# Altium PCB PCB1.PcbDoc
Units mm, origin at the board's own origin, x right, y up, seen from the top; angles counter-clockwise.
Board outline 10 x 9 mm, 2 copper layers (Top Layer, Bottom Layer); 8 components, 6 nets, 23 pads, 4 vias.
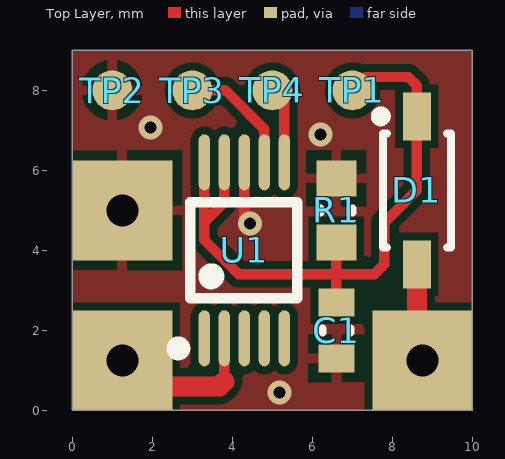
[diagram p0: Top Layer view]
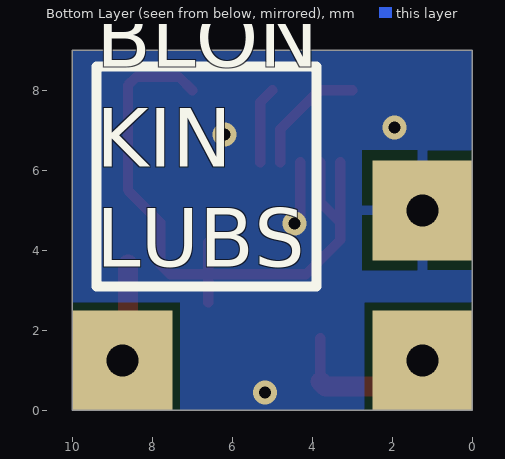
[diagram p1: Bottom Layer view, seen from below]

## Layer stack, top to bottom
Top Solder: solder mask 0.0102, Solder Resist, Dk 3.5
Top Layer: signal copper 0.0356
Dielectric 1: dielectric 0.32, FR-4, Dk 4.8
Bottom Layer: signal copper 0.0356
Bottom Solder: solder mask 0.0102, Solder Resist, Dk 3.5

## Board outline
0,0 10,0 10,9 0,9

## Design rules (kind name [scope] priority, off if disabled: settings)
Clearance [All] p1: gap=0.2 ignorepadtopadclearanceinfootprint=FALSE
PolygonConnect [All] p1: thpad.connectstyle=Relief thpad.reliefconductorwidth=0.254 thpad.reliefentries=4 thpad.polygonreliefangle="90 Angle" thpad.airgapwidth=0.254 smdpad.connectstyle=Relief smdpad.reliefconductorwidth=0.254 smdpad.reliefentries=4 smdpad.polygonreliefangle="90 Angle" smdpad.airgapwidth=0.254 via.connectstyle=Direct via.reliefconductorwidth=0.254 via.reliefentries=4 via.polygonreliefangle="90 Angle" via.airgapwidth=0.254
RoomDefinition Sheet1 [InComponentClass('Sheet1')] p1: confinementstyle=ConfineIn formatcopy=TRUE lockcomponents=FALSE outline -1.2,-1.2 11,-1.2 11,9.8 -1.2,9.8
RoutingVias [All] p1: holewidth=0.711 width=1.27 viastyle="Through Hole" minholewidth=0.711 minwidth=1.27 maxholewidth=0.711 maxwidth=1.27
SolderMaskExpansion SolderMaskExpansion_VIAS [IsVia] p1: expansion=-99
SolderMaskExpansion [All] p2: expansion=0.102
Width [All] p1: maxlimit=1 minlimit=0.254 preferedwidth=0.5
30 further rules are at their usual default settings.

## Components (designator, comment, footprint, x,y, rotation, side; value= is the part's Value field where it differs from the comment)
C1 "CAP 2.2uF 6.3V 0603(1608)" CAPC0603(1608)100_L 6.6,2 r90 top value=2.2uF
D1 "1N5819HW-7-F" DIOD-SOD-123-2_V 8.611,5.5 r90 top
R1 "10K 5% 0603(1608)" RESC0603(1608)_N 6.6,5 r270 top value="10000.00 Ohm"
TP1 "TEST_POINT" TP-SMD-1mm#1 7.3,11.5 r90 top
TP2 "TEST_POINT" TP-SMD-1mm#2 2.7,8.5 r90 top
TP3 "TEST_POINT" TP-SMD-1mm#3 4.5,8.5 r90 top
TP4 "TEST_POINT" TP-SMD-1mm#4 6,8.5 r90 top
U1 "CH554E" LC-MSOP-10 4.3,4 r0 top

## Footprints (in the part's own frame and the unit in brackets; to place one, negate y for a bottom-side part, rotate by r counter-clockwise, add the part's x,y. Pads: shape width x height; smd on the part's side, far side on the other; paste and mask are expansions set on the pad)
CAPC0603(1608)100_L [mm] "Chip Capacitor, Body 1.6x0.8mm, Height 1.0mm, IPC High Density"
  rect 0.7x0.9 smd: 1(-0.7,0) 2(0.7,0)
  silkscreen extent -0.05,-0.35 0.05,0.35, body extent -0.87,-0.47 0.88,0.48, height 1
DIOD-SOD-123-2_V [mm] "SOD-123, 2-Leads, Body 2.85x1.7mm (max), Pitch 3.7mm"
  rect 1.2x0.7 smd: 1(-1.85,0) 2(1.85,0)
  silkscreen extent -1.43,-0.85 1.97,1.02, body extent -1.42,-0.85 1.43,0.85, height 1.45
LC-MSOP-10 [mm] "Footprint from SZLCSC example"
  oval 0.28x1.4 smd mask+0.051: 1(-1,-2.2) 2(-0.5,-2.2) 3(0,-2.2) 4(0.5,-2.2) 5(1,-2.2) 6(1,2.2) 7(0.5,2.2) 8(0,2.2) 9(-0.5,2.2) 10(-1,2.2)
  silkscreen extent -1.8,-2.6 1.33,1.2
RESC0603(1608)_N [mm] "Chip Resistor, Body 1.6x0.8mm, IPC Medium Density"
  rect 0.9x1 smd: 1(-0.8,0) 2(0.8,0)
  silkscreen extent -0.05,-0.4 0.05,0.4, body extent -0.85,-0.47 0.85,0.47, height 0.6
TP-SMD-1mm#1 [mm] "Test point, round, 1mm, SMD"
  round 1 smd paste-999: 1(-3.5,0.3)
TP-SMD-1mm#2 [mm] "Test point, round, 1mm, SMD"
  round 1 smd paste-999: 1(-0.5,1.7)
TP-SMD-1mm#3 [mm] "Test point, round, 1mm, SMD"
  round 1 smd paste-999: 1(-0.5,1.5)
TP-SMD-1mm#4 [mm] "Test point, round, 1mm, SMD"
  round 1 smd paste-999: 1(-0.5,1)

## Part data
C1: library part CMP-1035-02754-1, "CAP 2.2uF 6.3V ±10% 0603 (1608 Metric) Thickness 1mm SMD", Case-EIA=0603, Case-Metric=1608, Rated Voltage="6.3 V", Tolerance=±10%, Max Thickness="1 mm", Technology=SMT
D1: library part CMP-0303-00003-1, "1.0 A Surface Mount Schottky Barrier Rectifier, 40 V, -65 to 125 degC, 2-Pin SOD-123 Package, RoHS, Tape and Reel", @ Terminal Temperature TT (degC)=90, Forward Voltage Drop VF (V)=0.45, Manufacturer="Diodes Inc", Maximum Average Rectified Current IO (A)=1, Maximum Reverse Current IR (uA)=50, Operating and Storage Temperature Range="-65 to 125 degC", Peak Forward Surge Current IFSM (A)=25, Peak Repetitive Reverse Voltage VRRM (V)=40, @ IF (A)=1, @ VR (V)=40, ComponentLink1Description="Manufacturer URL", ComponentLink1URL=http://www.diodes.com/, ComponentLink2Description=Datasheet, ComponentLink2URL=http://www.diodes.com/datasheets/ds30217.pdf, DatasheetVersion="Rev. 15-2", Mounting Technology="Surface Mount", PackageDescription="2-Pin SOD-123, Body 2.7 x 1.55 mm, Pitch 3.7 mm", PackageReference=SOD-123-2, Packing="Tape and Reel", PartNumber=1N5819HW-7-F, RoHS=TRUE, Total Capacitance CT (pF)=50, VR (RMS) (V)=28
R1: library part CMP-1012-00098-1, "10K 0.1W 5% 0603 (1608 Metric)  SMD", Case-EIA=0603, Case-Metric=1608, Power="0.1 W", Tolerance="5 %", Technology=SMT
TP1 TP2 TP3 TP4: "Test point"
U1: "8-bit enhanced USB microcontroller", Manufacturer=WCH, PartNumber=CH554E

## Free pads (board coordinates)
  rect 2.5x2.5 hole 0.8 paste+0: 1(8.75,1.25) 2(1.25,5) 3(1.25,1.25)

## Via types
v1: diameter 0.6, hole 0.3, Top Layer to Bottom Layer, 4 vias

## Nets (pads, with @x,y where several pads share a name; then routed paths per layer and width w, separated by ;. In a path a pad name is that pad's centre, name@x,y a point inside that pad or via, vN(x,y) a via of type N, cw(c..) or ccw(c..) an arc to the next point about the centre after c; other vN are vias at no path point)
GND: C1.1 pad.2 R1.1 TP2.1 U1.8 | length 1.6
  Top Layer w0.254: U1.8 4.3,4.821 v1(4.446,4.675)
  other v1: 5.183,0.45 6.2,6.9 1.95,7.075
LED_OUT: pad.3 U1.2 | length 2.8
  Top Layer w0.254: 3.8,0.726 U1.2
  Top Layer w0.5: pad.3@2.1,0.6 3.674,0.6 3.8,0.726
PUMP_IN: D1.1 pad.1 | length 2.5
  Top Layer w0.5: D1.1 8.611,1.389 pad.1
UDM: TP3.1 U1.7 | length 3
  Top Layer w0.254: TP3.1 3.83,8 4.8,7.03 U1.7
UDP: TP4.1 U1.6 | length 1.9
  Top Layer w0.254: TP4.1 5.3,7.7 U1.6
VCC: C1.2 D1.2 R1.2 TP1.1 U1.9 U1.10 | length 16.8
  Top Layer w0.254: U1.10 3.3,4.7 ; U1.9 3.8,5.2 3.3,4.7 ; C1.2 6.6,3.4 ; R1.2 6.6,3.4 ; TP1.1 7.333,8.333 8.402,8.333 8.611,8.125 D1.2 8.611,5.504 7.8,4.693 7.8,3.65 7.55,3.4 6.6,3.4 ; 3.3,4.7 3.3,4.257 4.157,3.4 6.6,3.4
pads on no net: U1.1 U1.3 U1.4 U1.5

## Polygon pours and split planes (outlines as drawn)
GND on Top Layer "GND_L01_P000" (solid, pour order 0): 0,9 10,9 10,0 0,0
GND on Bottom Layer "GND_L02_P002" (solid, pour order 2): 0,9 10,9 10,0 0,0

## Silkscreen, mask and mechanical layers (free items; w line width, h text height)
Bottom Overlay:
  lines w0.25: 3.9,3.1 9.4,3.1 9.4,8.6 3.9,8.6 3.9,3.1
  text "BLON / KIN / LUBS" at 9.4,3.1 h2.5
Mechanical 1:
  the board outline again, w0.2